# Altium PCB LED_v2.0.PcbDoc
Units mm, origin at the board's own origin, x right, y up, seen from the top; angles counter-clockwise.
Board outline 40 x 40 mm, 2 copper layers (Top Layer, Bottom Layer); 39 components, 36 nets, 117 pads, 17 vias.
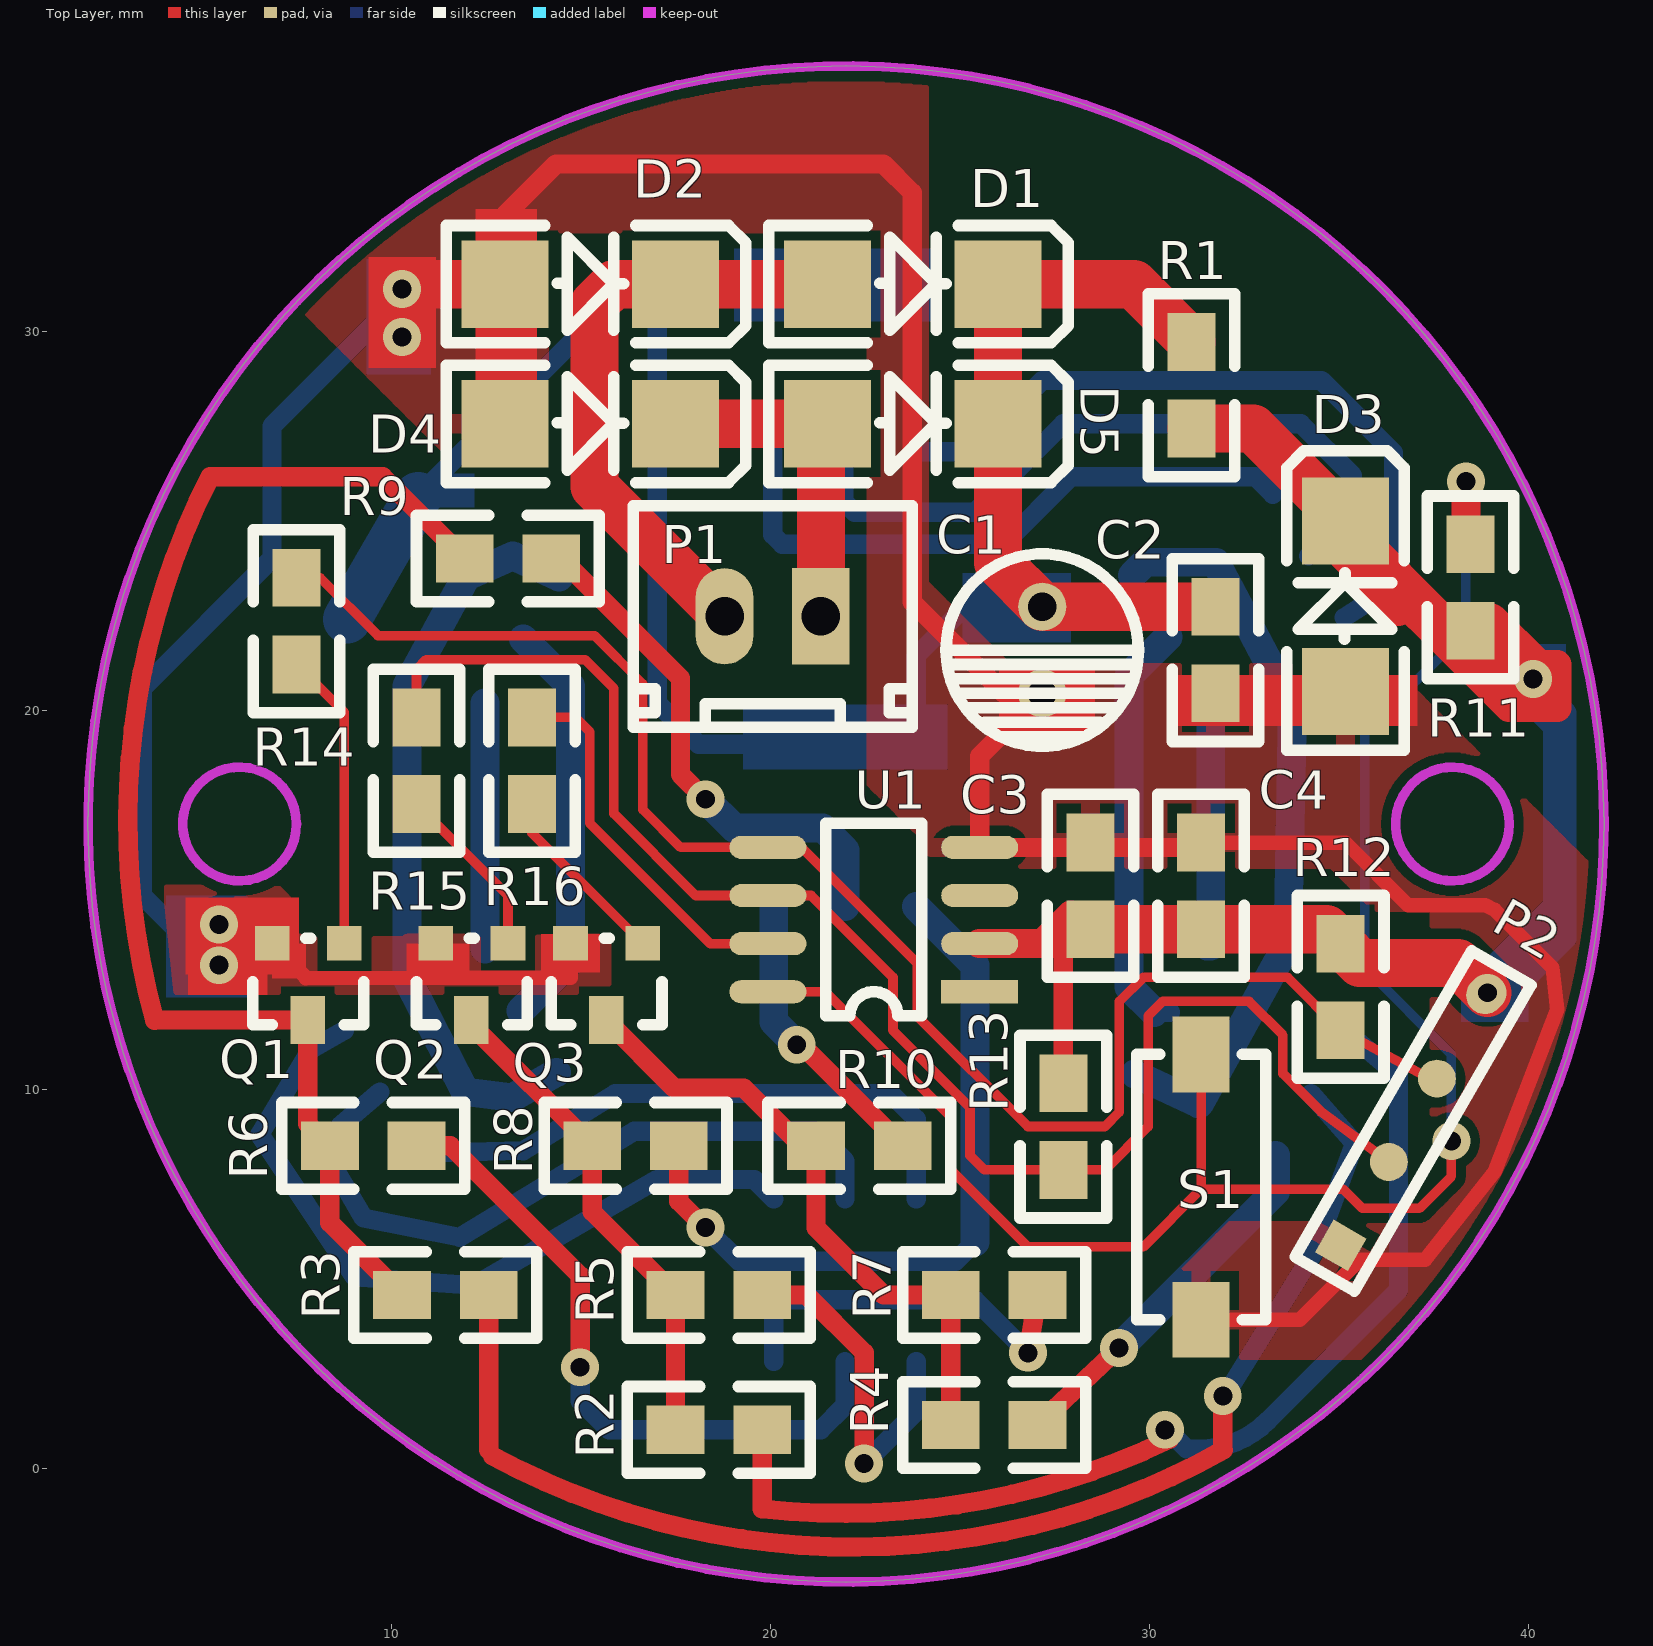
[diagram p0: Top Layer view]
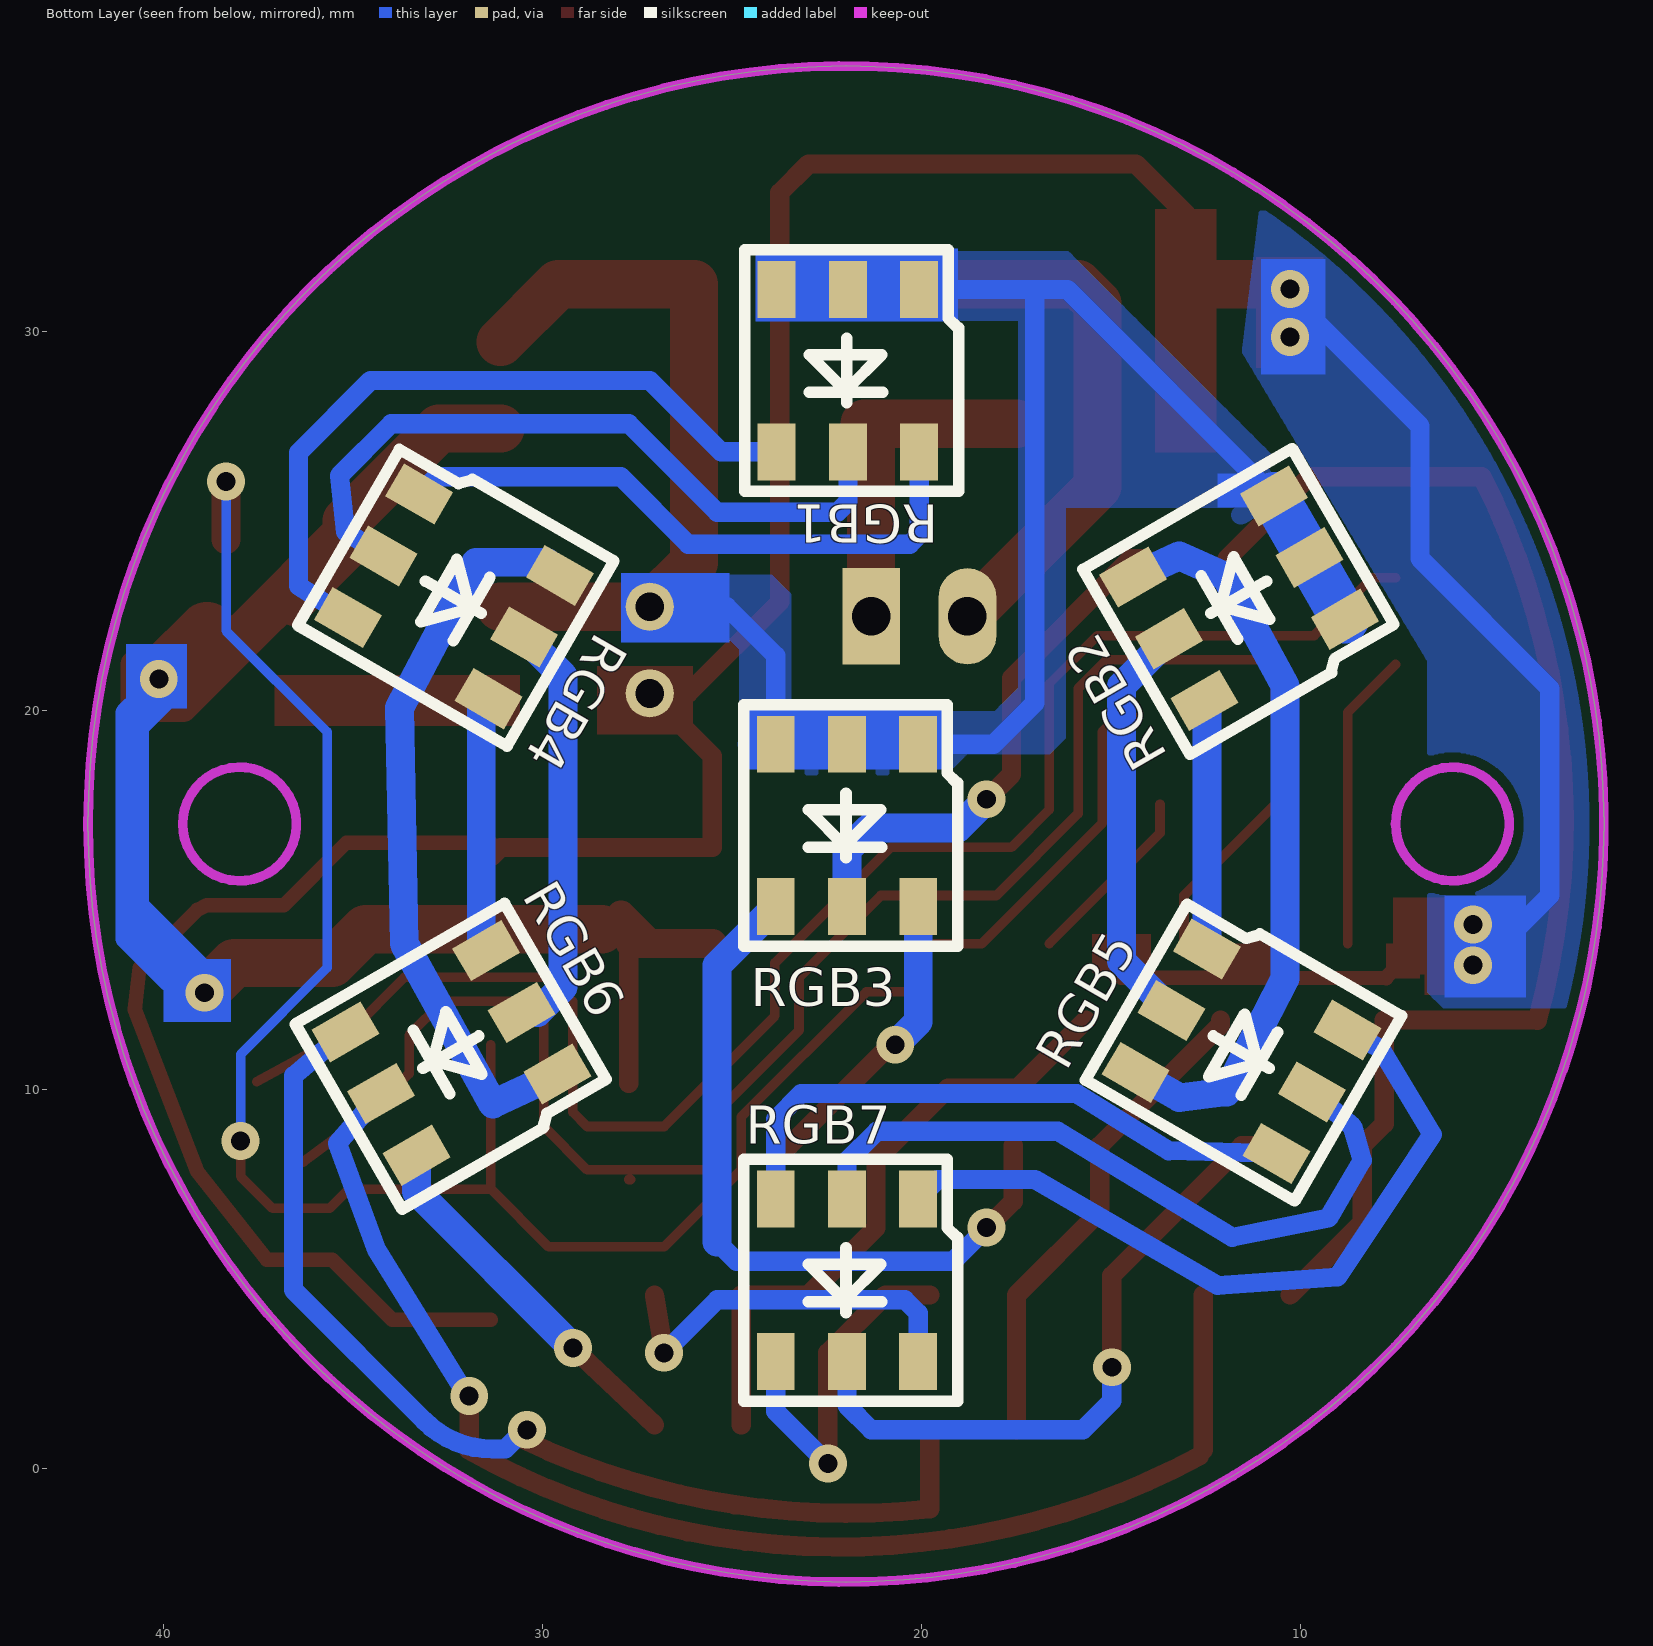
[diagram p1: Bottom Layer view, seen from below]

## Layer stack, top to bottom
Top Solder: solder mask 0.0102, Solder Resist, Dk 3.5
Top Layer: signal copper 0.0356
Dielectric 1: dielectric 0.32, FR-4, Dk 4.8
Bottom Layer: signal copper 0.0356
Bottom Solder: solder mask 0.0102, Solder Resist, Dk 3.5

## Board outline
2,17 ccw(c22,17) 22,-3 ccw(c22,17) 42,17 ccw(c22,17) 22,37 ccw(c22,17)

## Design rules (kind name [scope] priority, off if disabled: settings)
Clearance Clearance_1 [All] p1: gap=0.254 ignorepadtopadclearanceinfootprint=FALSE
ComponentClearance [All] p1 off: gap=0.254 collisioncheckmode=3 verticalgap=0.254 showdistances=FALSE
ComponentClearance ComponentClearanceForPin4 [All] p2 off: gap=0 collisioncheckmode=3 verticalgap=0 showdistances=FALSE
MinimumSolderMaskSliver [All] p1: minsoldermaskwidth=0.051
PolygonConnect [All] p1: connectstyle=Relief reliefconductorwidth=0.508 reliefentries=4 polygonreliefangle="90 Angle" airgapwidth=0.254
RoutingVias [All] p1: holewidth=0.711 width=1.27 viastyle="Through Hole" minholewidth=0.5 minwidth=0.7 maxholewidth=3 maxwidth=4
SilkToSilkClearance SilkToSilkClearance_1 [All] p1: silktosilkclearance=0.025
SilkToSolderMaskClearance [IsPad] p1: minsilkscreentomaskgap=0 clearancetoexposedcopper=TRUE
SolderMaskExpansion [All] p1: expansion=0.102
Width [All] p1: maxlimit=2.54 minlimit=0.254 preferedwidth=0.254
26 further rules are at their usual default settings.

## Components (designator, comment, footprint, x,y, rotation, side; value= is the part's Value field where it differs from the comment)
C1 "100μF/16V" CAP_D5 27.178,22.733 r0 top value=100pF
C2 "104" 0805 31.75,20.447 r90 top value=100pF
C3 "106" 0805 28.448,16.51 r270 top value=100pF
C4 "104" 0805 31.369,16.51 r270 top value=100pF
D1 "1N4007" SMB_diode 23.749,31.369 r180 top
D2 "1N4007" SMB_diode 15.24,31.369 r180 top
D3 "LL-34 5.1V" SMB_diode 35.052,22.733 r270 top
D4 "1N4007" SMB_diode 15.24,27.686 r180 top
D5 "1N4007" SMB_diode 23.749,27.686 r180 top
P1 "Header 2" CON_2PIN 21.336,22.479 r180 top
P2 "Header 4" TESTPonit_4P 35.052,5.883 r60 top
Q1 "2N3904" SOT_23 8.763,13.858 r180 top
Q2 "2N3904" SOT_23 13.081,13.858 r180 top
Q3 "2N3904" SOT_23 16.637,13.858 r180 top
R1 "560Ω" 0805 31.115,29.718 r270 top value=1K
R2 "110" 0805 17.501,1.016 r0 top value=1K
R3 "270" 0805 10.287,4.572 r0 top value=1K
R4 "75" 0805 24.765,1.143 r0 top value=1K
R5 "110" 0805 17.501,4.572 r0 top value=1K
R6 "270" 0805 8.382,8.509 r0 top value=1K
R7 "75" 0805 24.765,4.572 r0 top value=1K
R8 "390" 0805 15.303,8.509 r0 top value=1K
R9 "430" 0805 11.938,24.003 r0 top value=1K
R10 "360" 0805 21.209,8.509 r0 top value=1K
R11 "10KΩ" 0805 38.481,24.384 r270 top value=1K
R12 "10KΩ" 0805 35.052,11.557 r90 top value=1K
R13 "10KΩ" 0805 27.735,7.874 r90 top value=1K
R14 "4.3KΩ" 0805 7.5,23.495 r270 top value=1K
R15 "4.3K" 0805 10.668,19.812 r270 top value=1K
R16 "4.3K" 0805 13.716,19.812 r270 top value=1K
RGB1 "LED_RGB" RGB_5050 21.975,29 r90 bottom locked
RGB2 "LED_RGB" RGB_5050 11.608,23 r150 bottom locked
RGB3 "LED_RGB" RGB_5050 22,17 r90 bottom locked
RGB4 "LED_RGB" RGB_5050 32.392,23 r30 bottom locked
RGB5 "LED_RGB" RGB_5050 11.608,11 r30 bottom locked
RGB6 "LED_RGB" RGB_5050 32.392,11 r150 bottom locked
RGB7 "LED_RGB" RGB_5050 22,5 r90 bottom locked
S1 "SW-PB" SW_2 31.369,10.922 r270 top
U1 "stc15Fxx" SOP_8 25.527,12.573 r180 top

## Footprints (in the part's own frame and the unit in brackets; to place one, negate y for a bottom-side part, rotate by r counter-clockwise, add the part's x,y. Pads: shape width x height; smd on the part's side, far side on the other; paste and mask are expansions set on the pad)
0805 [mil]
  rect 60x50 smd: 1(0,0) 2(90,0)
  silkscreen extent -50,-45 140,45
CAP_D5 [mil] "直插铝电解，圆柱形，直径5mm"
  round 50 hole 30: 1(0,0) 2(0,-90)
  silkscreen extent -100,-145 100,55
CON_2PIN [mil] "直插2P端子，2.54mm间距"
  rect 60x100 hole 40: 1(0,0)
  oval 60x100 hole 40: 2(100,0)
  silkscreen extent -95,-115 195,115
RGB_5050 [mm] "RGB三色LED，缺角为正"
  rect 1.5x1 smd: B+(2.104,1.854) B-(-2.18,1.854) G+(2.104,-0.025) G-(-2.18,-0.025) R+(2.104,-1.905) R-(-2.18,-1.905)
  silkscreen extent -3.23,-2.95 3.15,2.69
SMB_diode [mm] "DO-214-AA/SMB; 2 C-Bend Leads; Body 5.3 x 3.6 mm, inc. leads (LxW)"
  rect 2.3x2.3 smd: 1(2.239,0.127) 2(-2.261,0.127)
  silkscreen extent -4.11,-1.42 3.79,1.68
SOP_8 [mil]
  rect 80x24 smd: 1(0,0)
  oval 80x24 smd: 2(0,-50) 3(0,-100) 4(0,-150) 5(220,-150) 6(220,-100) 7(220,-50) 8(220,0)
  silkscreen extent 60,-175 160,25
SOT_23 [mil]
  rect 36x36 smd: B(0,0) E(75,0)
  rect 36x50 smd: C(38,80)
  silkscreen extent -20,-5 95,85
SW_2 [mm] "sw-3mm*6mm*5mm"
  rect 2x1.5 smd: 1(0,0) 2(7,0)
  silkscreen extent 0,-1.7 7,1.7
TESTPonit_4P [mm] "程序下载口,4P,2.54mm间距"
  rect 1x1 smd: 1(0,0)
  round 1 smd: 2(2.54,0) 3(5.08,0) 4(7.62,0)
  silkscreen extent -0.86,-0.91 8.46,0.89

## Part data
C1: library part "Cap Pol3", "Polarized Capacitor (Surface Mount)", LatestRevisionDate=29-May-2009, LatestRevisionNote="IPC-7351 Footprint Added.", PackageDescription="Chip Capacitor", PackageReference=C0805, Published=8-Jun-2000, Publisher="Altium Limited"
C2 C3 C4: library part Cap, "Capacitor", LatestRevisionDate=17-Jul-2002, LatestRevisionNote="Re-released for DXP Platform.", PackageDescription="Radial Cap, Thru-Hole; 2 Leads; 0.3 in Pin Spacing", PackageReference=RAD-0.3, Published=8-Jun-2000, Publisher="Altium Limited"
D1 D2 D4 D5: library part "Diode 1N4007", "1 Amp General Purpose Rectifier", Code_JEDEC=DO-204-AL, ComponentLink1Description="Manufacturer Link", ComponentLink1URL=http://www.fairchildsemi.com/, ComponentLink2Description=Datasheet, ComponentLink2URL=http://www.fairchildsemi.com/ds/1N%2F1N4001.pdf, DatasheetVersion=1998, LatestRevisionDate=17-Jul-2002, LatestRevisionNote="Re-released for DXP Platform.", PackageDescription="Diode, Axial; Body 5.2 x 2.7 mm (LxDia. max), Lead Dia. 0.86 mm (max)", PackageReference=DO-41, PackageVersion=Aug-1999, Published=8-Jun-2000, Publisher="Altium Limited"
D3: library part "D Zener", "Zener Diode", LatestRevisionDate=17-Jul-2002, LatestRevisionNote="Re-released for DXP Platform.", PackageDescription="Diode, Thru-Hole; 2 Leads; 0.7 in Pin Spacing", PackageReference=DIODE-0.7, Published=8-Jun-2000, Publisher="Altium Limited"
P1: "Header, 2-Pin", LatestRevisionDate=17-Jul-2002, LatestRevisionNote="Re-released for DXP Platform.", Publisher="Altium Limited"
P2: "Header, 4-Pin", LatestRevisionDate=17-Jul-2002, LatestRevisionNote="Re-released for DXP Platform.", Publisher="Altium Limited"
Q1 Q2 Q3: "NPN General Purpose Amplifier", ComponentLink1Description="Manufacturer Link", ComponentLink1URL=http://www.fairchildsemi.com/, ComponentLink2Description=Datasheet, ComponentLink2URL=http://www.fairchildsemi.com/ds/2N%2F2N3904.pdf, DatasheetVersion=1997, LatestRevisionDate=15-Jan-2003, LatestRevisionNote="PCB Footprint 'BCY-W3/D4.7' replaced", PackageDescription="TO, Flat Index; 3 In-Line, Axial Leads; Body Dia. 4.5mm; Leads 0.51 x 0.48 mm (max)", PackageReference=TO-92A, PackageVersion=Sep-1998, Published=8-Jun-2000, Publisher="Altium Limited"
R1 R2 R3 R4 R5 R6 R7 R8 R9 R10 R11 R12 R13 R14 R15 R16: library part Res2, "Resistor", LatestRevisionDate=17-Jul-2002, LatestRevisionNote="Re-released for DXP Platform.", PackageDescription="Axial Device, Thru-Hole; 2 Leads; 0.4 in Pin Spacing", PackageReference=AXIAL-0.4, Published=8-Jun-2000, Publisher="Altium Limited"
S1: "Switch", LatestRevisionDate=17-Jul-2002, LatestRevisionNote="Re-released for DXP Platform.", PackageReference=SPST-2, Published=24-Mar-1999, Publisher="Altium Limited"

## Via types
v1: diameter 1, hole 0.5, Top Layer to Bottom Layer, 17 vias

## Nets (pads, with @x,y where several pads share a name; then routed paths per layer and width w, separated by ;. In a path a pad name is that pad's centre, name@x,y a point inside that pad or via, vN(x,y) a via of type N, cw(c..) or ccw(c..) an arc to the next point about the centre after c; other vN are vias at no path point)
B: Q3.C R4.1 R7.1 R10.1 | length 16.4
  Top Layer w0.508: Q3.C 17.465,10.033 19.304,10.033 R10.1@20.828,8.509 ; R10.1 21.209,6.35 22.987,4.572 R7.1 R4.1
G: Q2.C R2.1 R5.1 R8.1 | length 13
  Top Layer w0.508: Q2.C 12.116,11.697 R8.1 15.303,6.77 R5.1 R2.1
GND: C1.2 C2.1 C3.1 C4.1 D2.1 D3.1 D4.1 P2.1 Q1.E Q2.E Q3.E S1.2 U1.4 | length 105
  Top Layer w0.381: v1(5.461,14.351) 6.365,14.351 Q1.E ; Q1.E@6.858,13.843 7.747,12.954 ; 7.747,12.929 11.176,12.938 ; Q2.E 11.176,12.938 ; Q3.E 14.732,12.947 11.176,12.938 ; S1.2 33.975,3.922 35.56,5.507 37.28,5.507 39.117,7.831 40.767,12.106 40.64,13.208 39.116,14.732 38.862,14.859 36.83,14.859 35.179,16.51 C4.1
  Top Layer w0.508: D2.1 13.001,33.067 14.351,34.417 22.987,34.417 23.749,33.655 23.749,22.86 26.162,20.447 C1.2 25.527,18.796 U1.4 31.115,16.383 C4.1@31.369,16.129 ; D3.1@35.132,20.447 D3.1
  Top Layer w1.27: v1(10.287,31.115) 10.414,31.242 D2.1 D4.1
  Bottom Layer w0.508: v1(5.461,14.351) 5.177,14.351 4.684,13.858 3.429,15.113 3.429,20.574 6.858,24.003 6.858,27.504 v1@10.441,31.088
  other v1: 5.461,13.274 10.287,29.845
ICVCC: C3.2 C4.2 D3.2 P2.4 R1.2 R11.2 R12.2 R13.2 U1.2 | length 60.5
  Top Layer w0.508: 27.686,13.843 27.735,13.794 R13.2 ; R11.2@38.075,22.098 R11.2
  Top Layer w0.762: U1.2 27.178,13.843 ; 27.686,13.843 27.178,13.843 ; C3.2@27.94,14.605 27.178,13.843 ; D3.2@35.052,24.13 36.576,22.606 ; D3.2 38.075,22.098 37.465,22.098 ; 37.084,22.479 37.465,22.098 ; v1@39.751,20.828 39.941,21.018 40.132,21.209 40.767,21.209 40.767,20.066 39.497,20.066 37.465,22.098
  Top Layer w1.27: C3.2 C4.2 34.671,14.224 R12.2 35.56,13.335 38.141,13.335 v1(38.928,12.548) ; R1.2 32.741,27.432 D3.2 ; v1@39.941,21.018 v1(40.132,20.828)
  Top Layer w1.524: R11.2@38.862,22.098 v1@39.941,21.018
  Bottom Layer w0.508: v1(38.928,12.548) v1@39.233,12.853 ; 39.055,13.274 40.64,14.859 ; 39.878,20.32 40.64,19.558 ; v1(40.132,20.828) 40.64,20.32 ; v1@39.233,12.853 40.64,14.26 40.64,14.859 ; v1@39.233,12.853 39.904,12.853 41.021,13.97 41.021,19.939 40.64,20.32 ; 40.64,14.859 40.64,19.558 ; 40.64,19.558 40.64,20.32
LEDVCC: C1.1 C2.2 D1.2 D5.2 R1.1 RGB1.B+ RGB1.G+ RGB1.R+ RGB2.B+ RGB2.G+ RGB2.R+ RGB3.B+ RGB3.G+ RGB3.R+ | length 62.9
  Top Layer w0.508: C2.2@31.115,22.733 C2.2@31.623,23.241
  Top Layer w1.27: C2.2@31.115,22.733 C1.1 26.01,23.901 D5.2 D1.2 29.591,31.242 R1.1
  Bottom Layer w0.508: RGB2.B+ 16.159,31.104 17.018,31.104 ; RGB1.B+ 17.018,31.104 ; C1.1 25.146,22.733 23.854,21.441 RGB3.B+ RGB3.G+ RGB3.R+ 18.107,19.104 17.018,20.193 17.018,31.104
  Bottom Layer w1.27: RGB2.R+ RGB2.G+ RGB2.B+
NetD1_1: D1.1 D2.2 P1.2 | length 16
  Top Layer w1.27: P1.2 15.367,25.908 15.367,30.734 15.875,31.242 D2.2 D1.1
NetD4_2: D4.2 D5.1 P1.1 | length 9.2
  Top Layer w1.27: D4.2 D5.1 21.336,27.385 P1.1
NetP2_2: P2.2 R13.1 R15.1 U1.6 | length 41.9
  Top Layer w0.254: R15.1 10.668,21.082 10.922,21.336 15.113,21.336 15.875,20.574 15.875,17.272 18.034,15.113 U1.6 21.082,15.113 23.241,12.954 23.241,11.557 25.273,9.525 25.273,8.255 25.654,7.874 R13.1 28.829,7.874 29.972,9.017 29.972,11.938 30.353,12.319 32.639,12.319 33.528,11.43 33.528,10.414 34.544,9.398 P2.2 ; R13.1@27.686,7.62 R13.1@27.735,7.62
NetP2_3: P2.3 R12.1 R14.1 U1.5 | length 43.1
  Top Layer w0.254: R14.1 8.128,23.495 9.652,21.971 15.367,21.971 16.637,20.701 16.637,17.381 17.635,16.383 U1.5 20.828,16.383 23.876,13.335 23.876,11.938 26.797,9.017 28.829,9.017 29.21,9.398 29.21,12.319 29.845,12.954 33.655,12.954 R12.1 P2.3@37.55,10.204
NetQ1_2: Q1.B R14.2 | length 7.9
  Top Layer w0.254: R14.2 8.763,19.946 Q1.B@8.763,13.843
NetQ2_2: Q2.B R15.2 | length 4.7
  Top Layer w0.254: R15.2 13.081,15.113 Q2.B
NetQ3_2: Q3.B R16.2 | length 4.9
  Top Layer w0.254: R16.2 13.716,16.764 Q3.B@16.637,13.843
NetR2_2: R2.2 RGB6.B- | length 28.6
  Top Layer w0.508: 19.787,-1.075 R2.2 ; 19.806,-1.075 ccw(c21.918,18.813) v1@30.534,0.764
  Bottom Layer w0.508: v1(30.416,1.016) 30.48,1.016 30.988,0.508 31.329,0.508 ccw(c31.329,3.048) 33.125,1.252 36.576,4.703 36.576,10.356 RGB6.B-
NetR3_2: R3.2 RGB6.G- | length 35
  Top Layer w0.508: 12.573,0.481 R3.2 ; 12.67,0.325 ccw(c22.172,17.924) 31.957,0.481 ; 31.942,0.481 v1(31.942,1.905)
  Bottom Layer w0.508: v1(31.942,1.905) 32.105,2.079 34.37,5.739 35.419,8.574 RGB6.G-
NetR4_2: R4.2 RGB6.R- | length 9.9
  Top Layer w0.508: R4.2 v1(29.203,3.175) v1@29.337,3.302
  Bottom Layer w0.762: v1(29.203,3.175) 33.328,7.301 RGB6.R-
NetR5_2: R5.2 RGB7.B- | length 9.5
  Top Layer w0.508: R5.2 20.955,4.572 22.479,3.048 v1(22.479,0.127)
  Bottom Layer w0.508: v1(22.479,0.127) 23.854,1.502 RGB7.B-
NetR6_2: R6.2 RGB7.G- | length 17.8
  Top Layer w0.508: R6.2 11.557,8.509 14.986,5.08 v1(14.986,2.667)
  Bottom Layer w0.508: v1(14.986,2.667) 14.986,1.778 15.748,1.016 21.336,1.016 21.975,1.655 RGB7.G-
NetR7_2: R7.2 RGB7.R- | length 10.2
  Top Layer w0.508: v1(26.797,3.048) R7.2
  Bottom Layer w0.508: RGB7.R- 20.095,4.093 20.447,4.445 25.4,4.445 v1(26.797,3.048)
NetR8_2: R8.2 RGB3.B- | length 19.6
  Top Layer w0.508: R8.2 17.59,7.048 v1(18.288,6.35)
  Bottom Layer w0.508: v1(18.288,6.35) 19.177,5.461 24.892,5.461 25.4,5.969
  Bottom Layer w0.762: RGB3.B- 25.4,13.274 25.4,5.969
NetR9_2: R9.2 RGB3.G- | length 13.9
  Top Layer w0.508: R9.2 14.478,24.003 17.635,20.846 17.635,18.306 v1(18.288,17.653)
  Bottom Layer w0.762: v1(18.288,17.653) 19.045,16.896 21.387,16.896 21.975,16.308 RGB3.G-
NetR10_2: R10.2 RGB3.R- | length 7.8
  Top Layer w0.508: v1(20.701,11.176) 20.828,11.176 R10.2
  Bottom Layer w0.762: RGB3.R- 20.095,11.782 v1(20.701,11.176)
NetR11_1: R11.1 S1.1 U1.8 | length 48.7
  Top Layer w0.254: U1.8 21.463,12.573 24.765,9.271 24.765,7.874 26.797,5.842 29.845,5.842 31.369,7.366 ; S1.1@31.369,11.176 S1.1 31.369,7.366 ; v1(37.973,8.636) 37.973,7.701 37.13,6.858 35.623,6.858 35.115,7.366 31.369,7.366 ; R11.1@38.354,24.511 R11.1
  Top Layer w0.762: R11.1@38.354,24.511 v1(38.354,26.035)
  Bottom Layer w0.254: v1(37.973,8.636) 37.973,10.922 35.687,13.208 35.687,19.431 38.354,22.098 v1(38.354,26.035)
NetR16_1: R16.1 U1.7 | length 9.5
  Top Layer w0.254: 14.351,19.812 14.859,19.812 15.24,19.431 15.24,17.018 18.415,13.843 U1.7
NetRGB1_B-: RGB1.B- RGB4.B+ | length 19.3
  Bottom Layer w0.508: RGB1.B- 25.296,26.82 27.178,28.702 34.544,28.702 36.449,26.797 36.449,23.287 RGB4.B+
NetRGB1_G-: RGB1.G- RGB4.G+ | length 19.1
  Bottom Layer w0.508: RGB1.G- 21.949,25.5 22.225,25.224 25.4,25.224 27.735,27.559 33.999,27.559 35.366,26.192 35.201,24.71 RGB4.G+
NetRGB1_R-: RGB1.R- RGB4.R+ | length 16.4
  Bottom Layer w0.508: RGB1.R- 20.07,24.634 20.32,24.384 26.162,24.384 27.94,26.162 32.802,26.162 RGB4.R+
NetRGB2_B-: RGB2.B- RGB5.B+ | length 19.6
  Bottom Layer w0.762: RGB5.B+ 13.208,9.779 11.953,9.933 10.414,12.923 10.414,20.64 11.978,23.527 13.208,24.074 RGB2.B-
NetRGB2_G-: RGB2.G- RGB5.G+ | length 10.9
  Bottom Layer w0.762: RGB5.G+ 14.732,13.389 14.732,20.639 RGB2.G-
NetRGB2_R-: RGB2.R- RGB5.R+ | length 6.6
  Bottom Layer w0.508: RGB2.R-@12.477,20.194 RGB2.R-
  Bottom Layer w0.762: RGB5.R+ RGB2.R-@12.477,20.194
NetRGB4_B-: RGB4.B- RGB6.B+ | length 6.8
  Bottom Layer w0.508: RGB4.B- RGB4.B-@31.623,20.112 ; RGB6.B+ RGB6.B+@31.623,13.784
  Bottom Layer w0.762: RGB6.B+@31.623,13.784 RGB4.B-@31.623,20.112
NetRGB4_G-: RGB4.G- RGB6.G+ | length 11
  Bottom Layer w0.508: RGB6.G+@30.134,12.03 RGB6.G+
  Bottom Layer w0.762: RGB6.G+@30.134,12.03 29.464,12.7 29.464,20.904 RGB4.G-
NetRGB4_R-: RGB4.R- RGB6.R+ | length 19.6
  Bottom Layer w0.762: RGB4.R- 29.899,23.907 31.759,23.907 33.782,20.066 33.655,13.843 31.319,9.61 RGB6.R+
NetRGB5_B-: RGB5.B- RGB7.B+ | length 16
  Bottom Layer w0.508: RGB5.B- 13.483,8.382 15.909,9.888 23.179,9.888 23.854,9.213 RGB7.B+
NetRGB5_G-: RGB5.G- RGB7.G+ | length 19
  Bottom Layer w0.508: RGB5.G- 8.636,9.017 8.382,8.128 9.271,6.604 11.811,6.096 16.41,8.89 21.19,8.89 21.975,8.106 RGB7.G+
NetRGB5_R-: RGB5.R- RGB7.R+ | length 20.2
  Bottom Layer w0.508: RGB5.R- 7.874,11.049 6.53,8.81 9.036,5.051 12.192,4.826 17.011,7.62 19.579,7.62 RGB7.R+
R: Q1.C R3.1 R6.1 R9.1 | length 34.7
  Top Layer w0.508: 3.761,11.813 cw(c23.05,17.098) 5.225,26.168 ; 3.761,11.826 Q1.C 7.798,9.093 R6.1 8.382,6.477 R3.1 ; 5.237,26.162 9.779,26.162 R9.1
pads on no net: U1.1 U1.3

## Polygon pours and split planes (outlines as drawn)
GND on Top Layer "GND_L01_P004" (hatched Horizontal grid 0.025 track 0.127, remove dead copper, pour order 4): 7.366,14.097 7.366,13.97 15.748,14.051 15.748,12.781 15.514,12.548 4.318,12.548 4.064,14.986 4.064,15.367 6.985,15.367 7.366,14.986
GND on Top Layer "GND_L01_P002" (hatched Horizontal grid 0.025 track 0.127, remove dead copper, pour order 2): 14.097,26.416 11.811,26.416 6.985,31.242 6.985,31.369 13.081,37.465 24.13,37.465 24.13,23.368 26.289,21.209 36.323,21.209 42.291,15.241 42.291,2.921 30.734,2.921 30.607,3.048 30.607,4.953 32.131,6.477 36.195,6.477 37.465,7.747 37.465,14.732 35.941,14.732 34.798,15.875 24.765,15.875 22.606,18.034 22.606,32.639 14.097,32.639
LEDVCC on Bottom Layer "LEDVCC_L02_P010" (hatched Horizontal grid 0.025 track 0.127, remove dead copper, pour order 10): 24.511,30.307 24.486,30.307 17.399,30.307 17.399,20.579 18.059,19.919 23.495,19.919 23.495,23.043 24.003,23.551 27.633,23.551 27.94,23.244 27.94,22.306 27.584,21.951 25.095,21.951 24.765,21.621 24.765,18.319 19.4,18.319 18.816,18.903 16.637,18.903 16.256,19.284 16.256,25.381 11.456,25.381 10.467,26.37 16.182,32.085 24.638,32.085 24.638,30.307
GND on Bottom Layer "GND_L02_P006" (hatched Horizontal grid 0.025 track 0.127, remove dead copper, pour order 6): 11.496,29.457 6.604,21.304 6.604,12.573 6.223,12.192 1.651,12.192 1.651,25.781 9.525,33.655 10.922,34.163

## Keep-outs
Keep-Out Layer:
  circle w0.254: c38,17 r1.5
  circle w0.254: c6,17 r1.5
  circle w0.254: c22,17 r20

## Other copper
Top Layer:
  rectangle net GND: 4.644,12.482 6.731,13.289
  rectangle net GND: 26.035,19.36 28.575,21.163
  rectangle net GND: 30.607,19.589 37.084,20.935
  rectangle net GND: 12.229,26.802 13.843,33.228
  rectangle net GND: 9.398,29.037 11.176,31.958
  rectangle net GND: 13.957,13.083 15.507,14.097
  rectangle net GND: 10.401,12.908 12.065,13.848
  rectangle net GND: 6.858,12.929 7.747,13.843
  rectangle net GND: 4.572,13.035 7.569,15.06
Bottom Layer:
  rectangle net LEDVCC: 10.981,25.354 12.192,26.243
  rectangle net LEDVCC: 19.05,30.257 24.384,32.187
  rectangle net LEDVCC: 19.277,18.442 24.672,20.147
  rectangle net LEDVCC: 25.07,21.786 27.94,23.622
  rectangle net ICVCC: 38.227,11.782 40.005,13.442
  rectangle net ICVCC: 39.386,20.046 41.002,21.748
  rectangle net GND: 4.064,12.426 6.215,15.118
  rectangle net GND: 9.344,28.86 11.049,31.908

## Silkscreen, mask and mechanical layers (free items; w line width, h text height)
Mechanical 1:
  circle w0.025: c38,17 r1.5
  circle w0.025: c6,17 r1.5
  circle w0.025: c22,17 r20
Mechanical 2:
  circle w0.025: c36.503,17.1 r0.003
  circle w0.025: c39.497,16.9 r0.003
  circle w0.025: c7.359,17.634 r0.003
  circle w0.025: c4.641,16.366 r0.003
  circle w0.025: c34.395,1.304 r0.003
  circle w0.006: c9.604,32.696 r0.003